# EAGLE board pot-boardDesp3 (EAGLE 6.6.0)
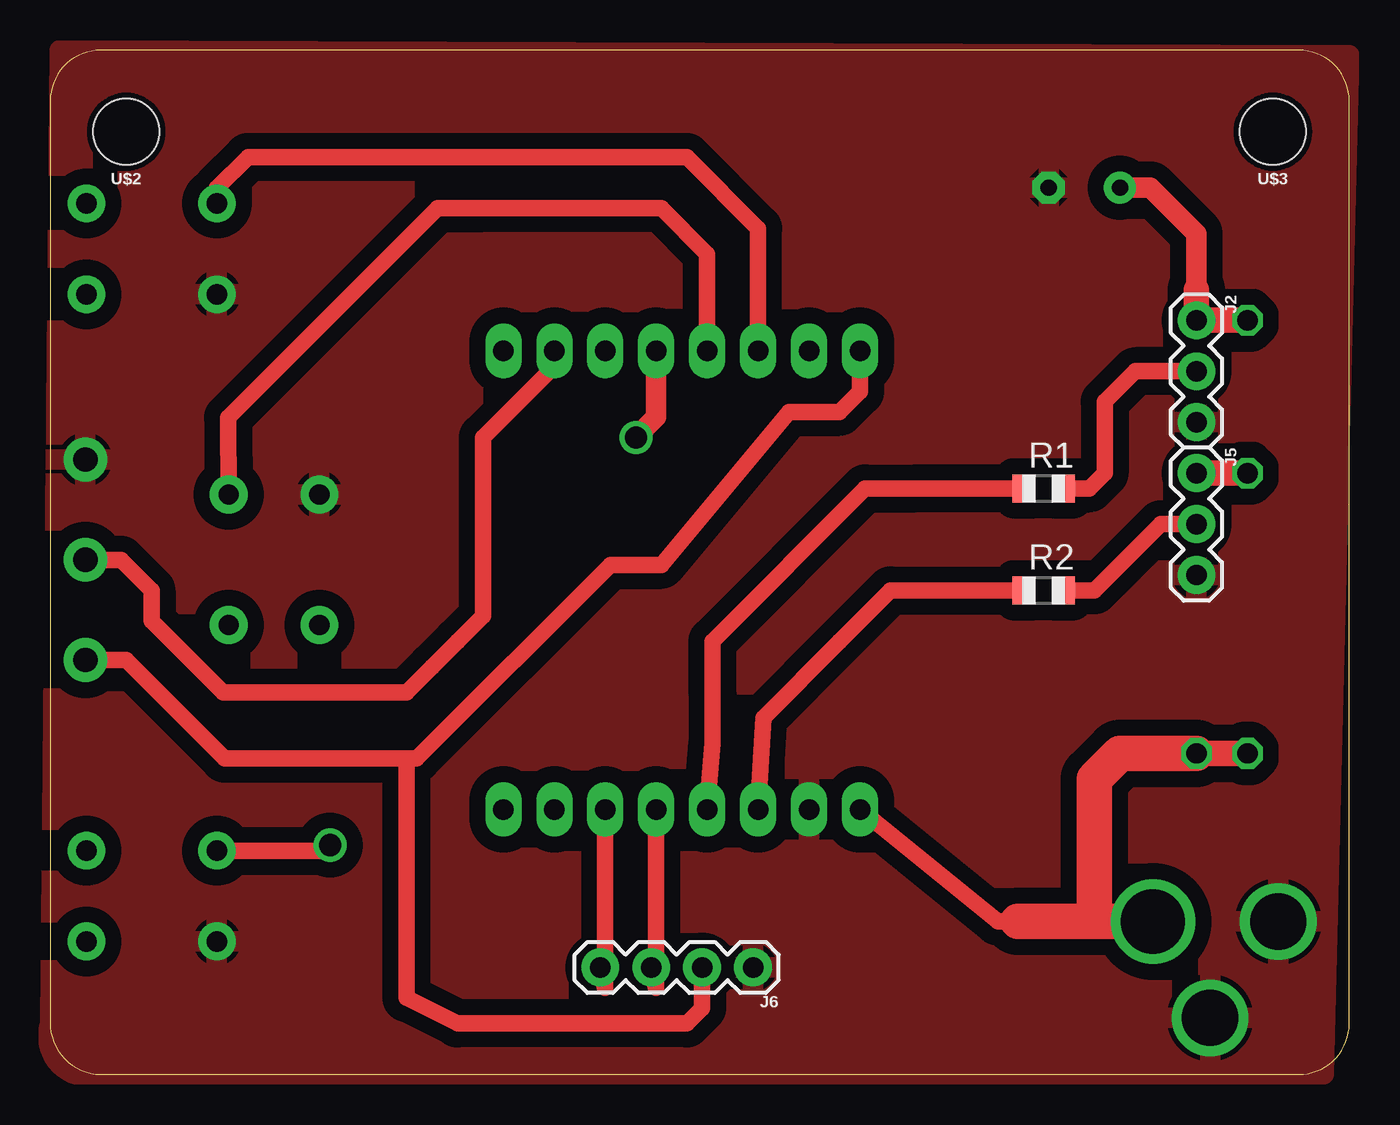
[diagram p0: board, top side]
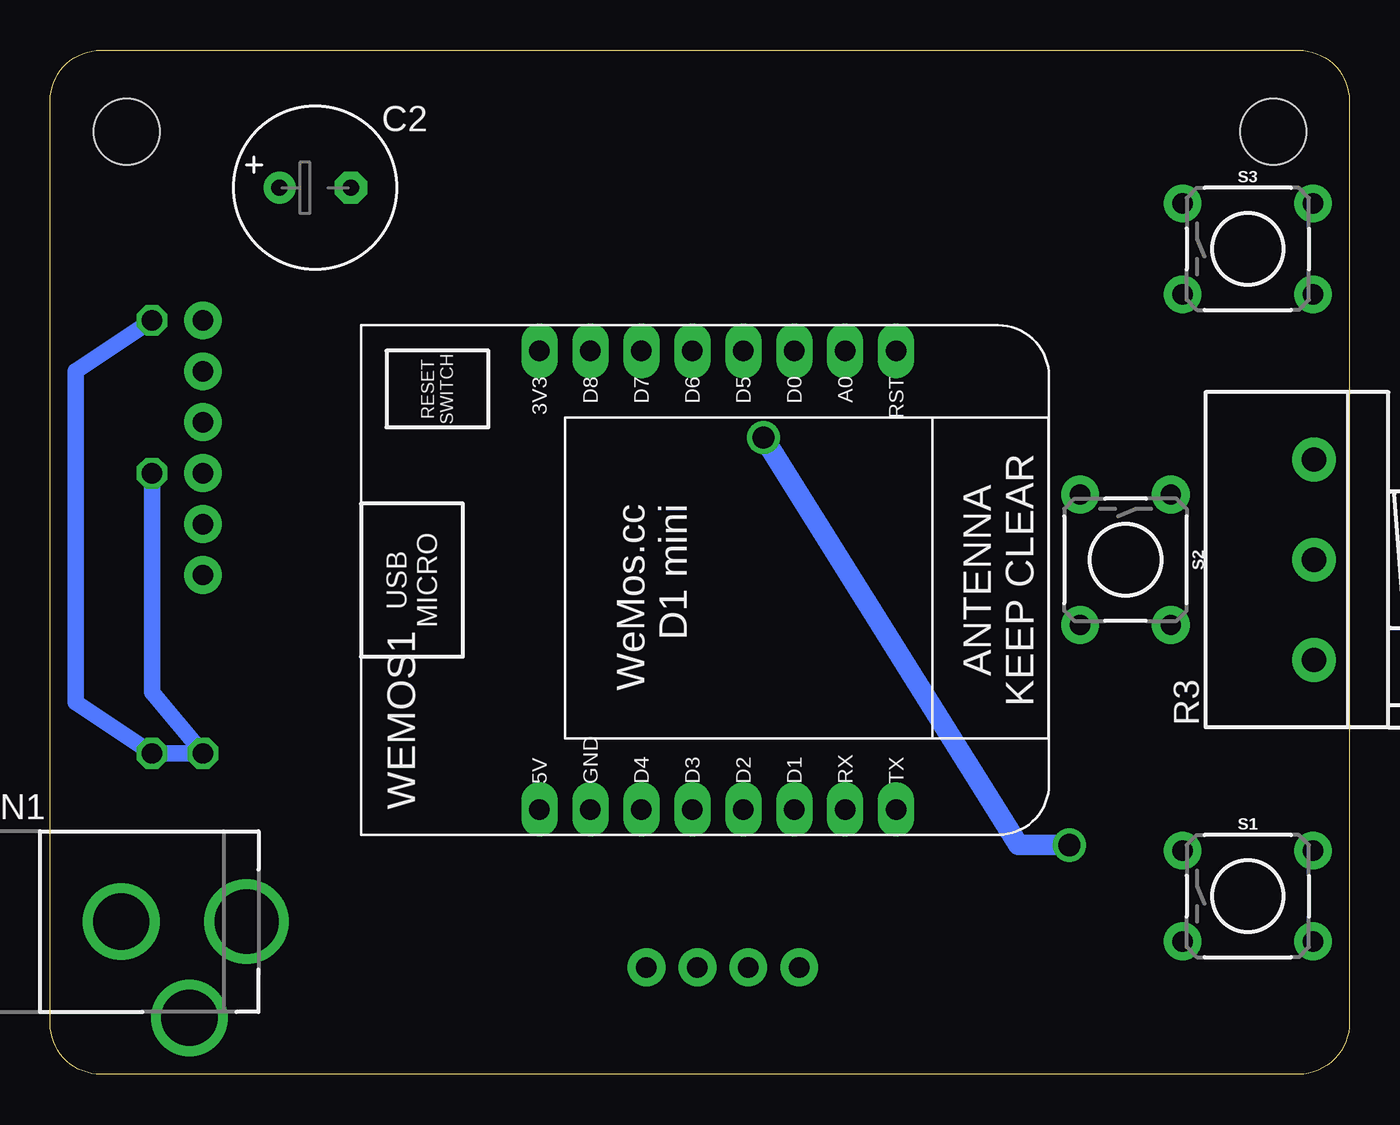
[diagram p1: board, bottom side, seen from below]

Size 64.75 x 51.05 mm. Coordinates in mm from the lower left corner, seen from the top.
Outline: 64.75,2.54 64.75,48.51 arc90 62.21,51.05 2.54,51.05 arc90 0,48.51 0,2.61 arc90 2.52,0 62.21,0 arc90 64.75,2.54
Copper layers (1*16): Top 0.035mm / dielectric 1.5mm / Bottom 0.035mm
Design rules "OthermillDRC_1_32_v2": minimum track width 8mil, minimum drill 0.8mm, track to track 0.794003125mm, track to pad 0.794003125mm, pad to pad 0.794003125mm, via to via 0.794003125mm, smd to smd 0mil, copper to edge 0mil, drill to drill 1mil, minimum pad ring 10mil, minimum via ring 10mil, stop-mask expansion 1mil, vias tented up to drill 30mil, thermal gap 10mil

## Footprints (pad centres in the part's own frame; a part is rotated, then mirrored left to right if it is on the bottom)
E3,5-8 = drill 0.813 pad 1.6: + -1.778,0 | drill 0.813 pad 1.6 octagon: - 1.778,0
DCJACK_2MM_PTH = drill 2.8: GND 0,7.35; GNDBREAK 4.8,10.75 | drill 3.2: PWR 0,13.6
1X03 = drill 1.016 pad 1.88: 1 0,0; 2 2.54,0; 3 5.08,0
1X04 = drill 1.016 pad 1.88: 1 0,0; 2 2.54,0; 3 5.08,0; 4 7.62,0
R0805 = smd 1.1 x 1.4: 1 -1,0; 2 1,0
3RP/1610N = drill 1.2 pad 2.184: 1 -5,0; 2 0,0; 3 5,0
TACTILE_SWITCH_PTH_6.0MM = drill 1.016 pad 1.88: 1 -3.251,2.261; 2 3.251,2.261; 3 -3.251,-2.261; 4 3.251,-2.261
STAND-OFF = hole 3.302: 0,0
WEMOS-D1-MINI = drill 1.016 pad 1.829 long: 3V3 -10.16,-10.16; 5V 12.7,-10.16; A0 -10.16,5.08; D0 -10.16,2.54; D1 12.7,2.54; D2 12.7,0; D3 12.7,-2.54; D4 12.7,-5.08; D5 -10.16,0; D6 -10.16,-2.54; D7 -10.16,-5.08; D8 -10.16,-7.62; GND 12.7,-7.62; RESET -10.16,7.62; RX 12.7,5.08; TX 12.7,7.62

## Placement (x,y rotation side)
C2  [E3,5-8]  51.54,44.2 0 bottom
CN1  [DCJACK_2MM_PTH]  68.56,7.62 270 bottom
J2  [1X03]  57.13,37.59 270 top
J5  [1X03]  57.13,29.97 270 top
J6  [1X04]  35.03,5.33 180 top
R1  500  [R0805]  49.51,29.21 0 top
R2  500  [R0805]  49.51,24.13 0 top
R3  [3RP/1610N]  1.76,25.65 90 bottom
S1  tact6mm  [TACTILE_SWITCH_PTH_6.0MM]  5.06,8.89 0 bottom
S2  tact6mm  [TACTILE_SWITCH_PTH_6.0MM]  11.16,25.65 270 bottom
S3  tact6mm  [TACTILE_SWITCH_PTH_6.0MM]  5.06,41.15 0 bottom
U$2  [STAND-OFF]  3.79,46.99 180 top
U$3  [STAND-OFF]  60.94,46.99 180 top
WEMOS1  [WEMOS-D1-MINI]  30.21,25.91 270 bottom

## Library data of the parts
C2 CN1 R1 R2 = adafruit
J2 J5 = SparkFun-Connectors
J6 = SparkFun-Connectors; PROD_ID: CONN-09696
R3 = pot
S1-S3 = SparkFun-Switches; PROD_ID: SWCH-08441; SF_SKU: COM-00097
U$2 U$3 = SparkFun-Hardware
WEMOS1 = esp8266modules

## Nets
+3V3: J6.2 R3.1 WEMOS1.3V3
A0: R3.2 WEMOS1.A0
BUTT1: S1.1 WEMOS1.D5
BUTT2: S2.1 WEMOS1.D6
BUTT3: S3.1 WEMOS1.D7
GND: C2.- CN1.GND CN1.GNDBREAK J2.3 J5.3 J6.1 R3.3 S1.3 S2.3 S3.3 WEMOS1.GND
LED1: R2.1 WEMOS1.D4
LED1O: J5.2 R2.2
LED2: R1.1 WEMOS1.D3
LED2O: J2.2 R1.2
SCL: J6.4 WEMOS1.D1
SDA: J6.3 WEMOS1.D2
VIN: C2.+ CN1.PWR J2.1 J5.1 WEMOS1.5V

## Tracks (layer width: path | path; a pad name or v marks a point on that pad's centre or on a via)
+3V3
  Top 0.813: R3.1 3.79,20.65 8.7,15.75 17.76,15.75 | J6.2 32.49,3.3 31.73,2.54 20.3,2.54 17.76,3.81 17.76,15.75 | WEMOS1.3V3 40.37,34.04 39.35,33.02 36.81,33.02 30.46,25.4 29.7,25.4 27.92,25.4 18.27,15.75 17.76,15.75
A0
  Top 0.813: R3.2 3.54,25.65 5.06,24.13 5.06,22.61 8.62,19.05 12.68,19.05 17.76,19.05 19.03,20.32 20.3,21.59 21.57,22.86 21.57,31.75 25.13,35.31 WEMOS1.A0
BUTT1  (via drill 1.1)
  Top 0.813: S1.1 13.95,11.15 v13.95,11.43
  Top 1.016: v29.19,31.75 30.21,32.77 WEMOS1.D5
  Bottom 1.016: v13.95,11.43 16.49,11.43 v29.19,31.75
BUTT2
  Top 0.813: WEMOS1.D6 32.75,40.89 30.46,43.18 21.57,43.18 20.3,43.18 19.31,43.18 8.87,32.74 S2.1
BUTT3
  Top 0.813: WEMOS1.D7 35.29,42.16 31.73,45.72 9.86,45.72 8.31,44.17 S3.1
GND
  pour Top: 0.49,51.05 0.01,2.57 arc91 1.28,0 63.48,0 64.75,50.8
LED1
  Top 0.813: WEMOS1.D4 35.54,17.78 39.35,21.59 41.89,24.13 R2.1
LED1O
  Top 0.813: J5.2 55.86,27.43 55.35,27.43 52.05,24.13 R2.2
LED2
  Top 0.813: R1.1 44.43,29.21 43.16,29.21 40.62,29.21 33,21.59 33,19.05 33,16.51 WEMOS1.D3
LED2O
  Top 0.813: R1.2 51.8,29.21 52.56,29.97 52.56,30.23 52.56,33.53 54.08,35.05 J2.2
SCL
  Top 0.813: WEMOS1.D1 27.67,4.32 J6.4
SDA
  Top 0.813: WEMOS1.D2 30.21,4.32 J6.3
VIN  (via drill 1.02)
  Top 0.813: WEMOS1.5V 47.22,7.62 48.24,7.62
  Top 1.016: C2.+ 54.84,44.2 55.86,43.18 57.13,41.91 57.13,39.12
  Top 1.27: v59.67,37.59 J2.1 57.13,39.12 | J5.1 v59.67,29.97 | v57.13,16 v59.67,16
  Top 1.778: 52.05,7.62 52.05,14.73 53.32,16 v57.13,16 | CN1.PWR 52.05,7.62 | 48.24,7.62 52.05,7.62
  Bottom 0.813: v59.67,37.59 63.48,35.05 63.48,18.54 v59.67,16 v57.13,16 59.67,19.05 v59.67,29.97

## Text on the board
tPlace: ILOVELAMP | pot-boardDesp3